# Altium PCB netv2mvp-usb3-v1.PcbDoc
Units mm, origin at the board's own origin, x right, y up, seen from the top; angles counter-clockwise.
Board outline 116 x 27 mm, 4 copper layers (Top Layer, Int1 (GND), Int2 (PWR), Bottom Layer), stack 1.115 mm thick; 6 components, 37 nets, 334 pads, 0 vias.
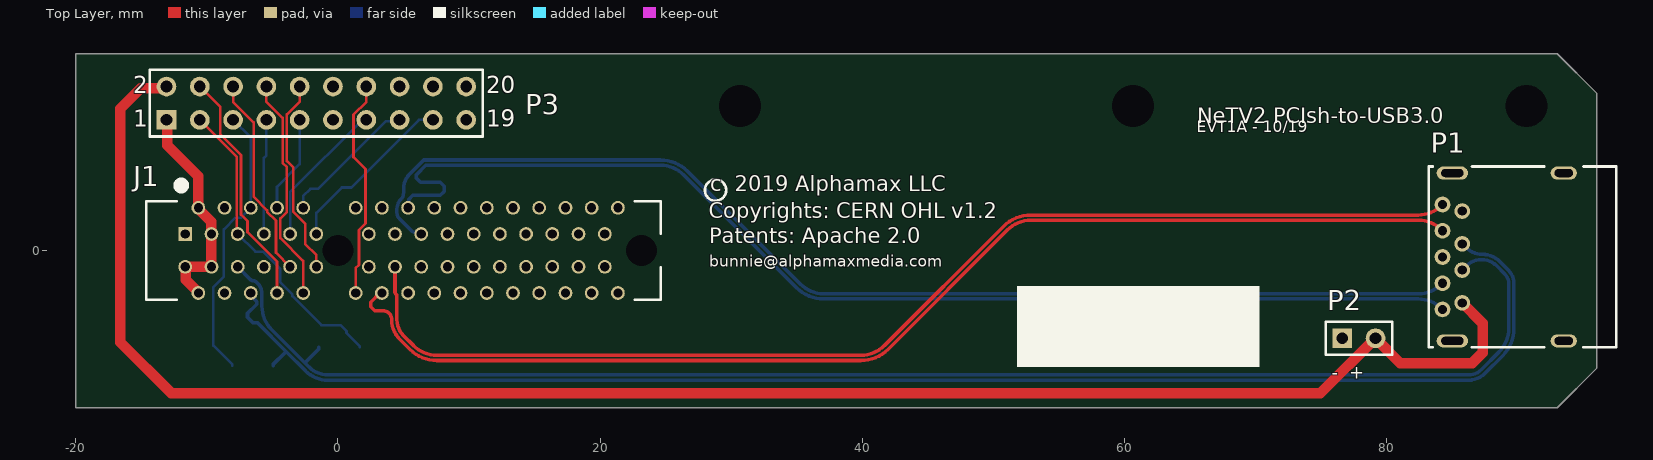
[diagram p0: Top Layer view]
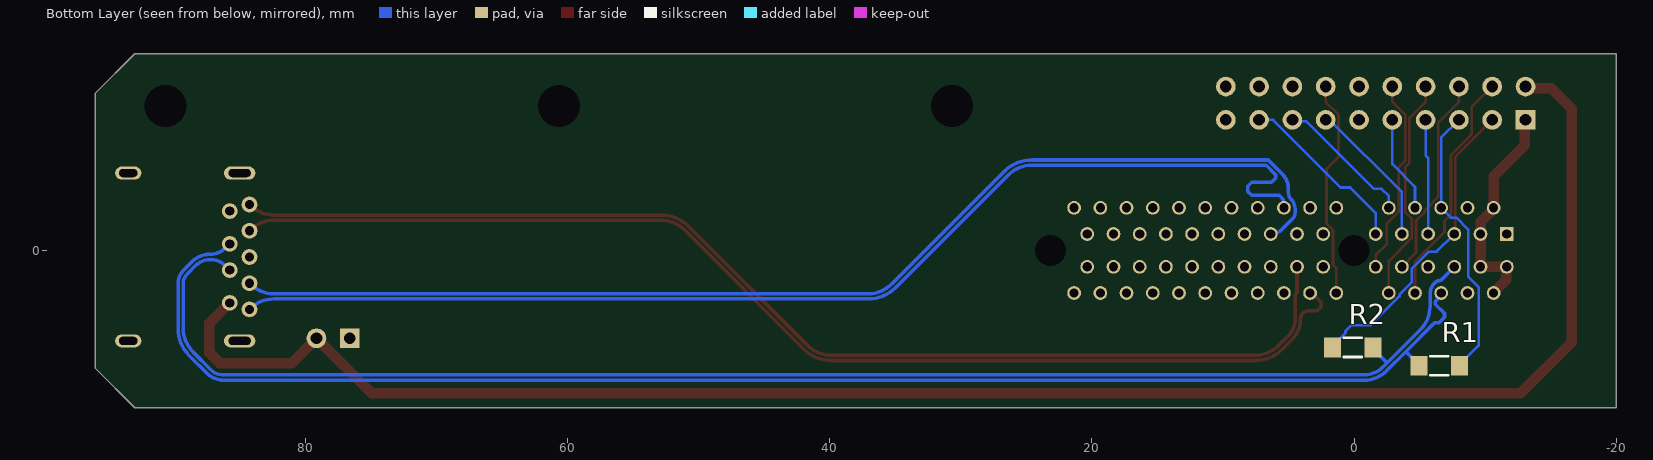
[diagram p1: Bottom Layer view, seen from below]
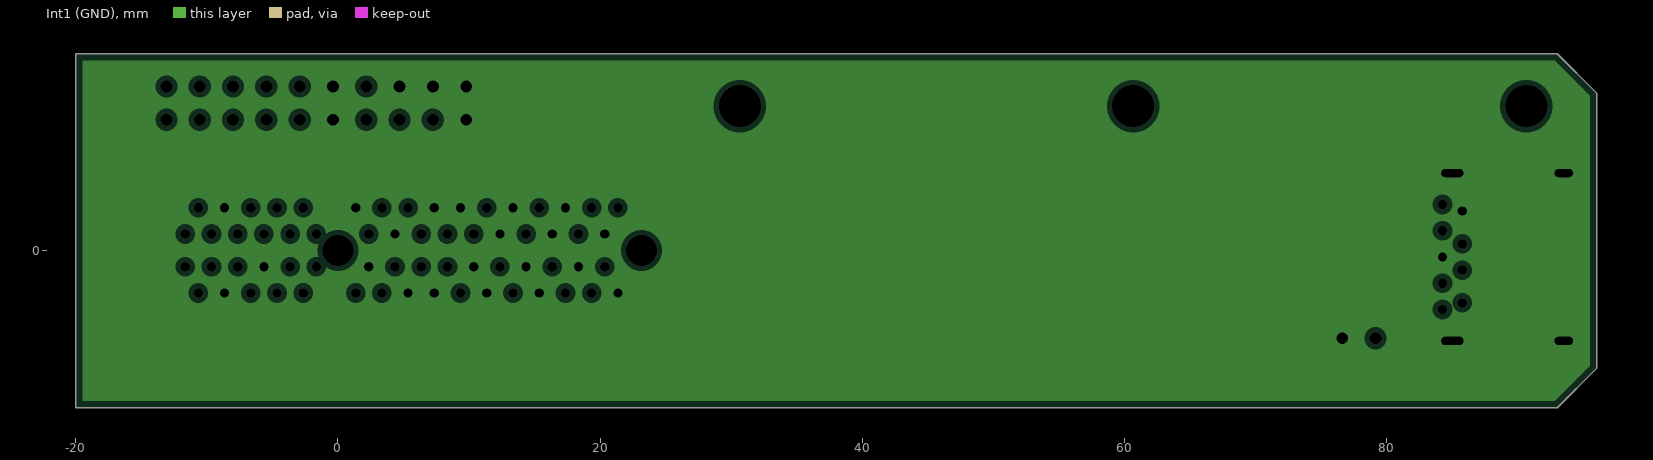
[diagram p2: Int1 (GND), clearances drawn from the general rule]
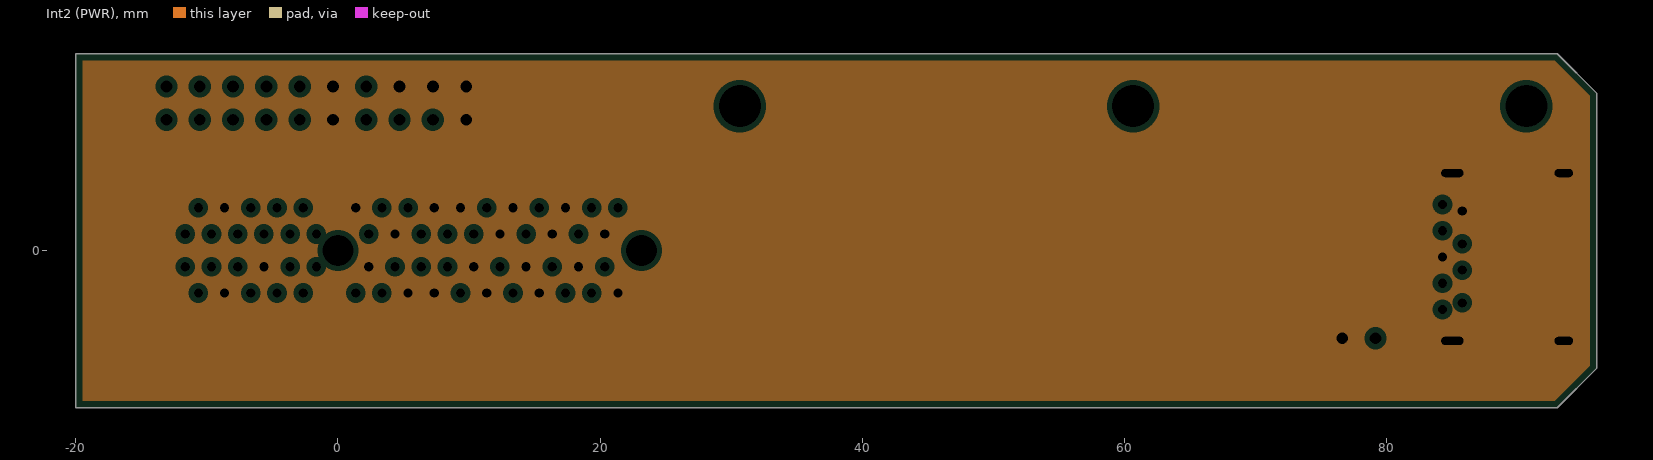
[diagram p3: Int2 (PWR), clearances drawn from the general rule]

## Layer stack, top to bottom
Top Solder: solder mask 0.0254, SM-001, Dk 4
Top Layer: signal copper 0.035
Dielectric 1: prepreg 0.1295, PP-017, Dk 4.3
Dielectric 2: prepreg 0.1295, PP-017, Dk 4.3
Int1 (GND): plane copper 0.035, net GND
Dielectric 3: core 0.4572, Core-035, Dk 4.7
Int2 (PWR): plane copper 0.035, net GND
Dielectric 4: prepreg 0.1295, PP-017, Dk 4.3
Dielectric 5: prepreg 0.1295, PP-017, Dk 4.3
Bottom Layer: signal copper 0.035
Bottom Solder: solder mask 0.0254, SM-001, Dk 4

## Board outline
-20,-12 -20,15 93,15 96,12 96,-9 93,-12

## Design rules (kind name [scope] priority, off if disabled: settings)
Clearance [All] p1: gap=0.125 ignorepadtopadclearanceinfootprint=FALSE
DiffPairsRouting [All] p1: maxlimit=0.127 minlimit=0.127 mostfreqgap=0.127 toplayer_minwidth=0.271 toplayer_maxwidth=0.271 toplayer_prefwidth=0.271 bottomlayer_minwidth=0.271 bottomlayer_maxwidth=0.271 bottomlayer_prefwidth=0.271 impedanceprofiledriven=TRUE impedanceprofileid={196FDF88-7312-467C-9229-585F1296B65F} impedanceprofilevalue=85.000000 maxuncoupledlength=12.7
HoleSize [All] p1: absolutevalues=TRUE maxlimit=5 minlimit=0.025 maxpercent=80.000 minpercent=20.000
MinimumSolderMaskSliver [All] p1 off: minsoldermaskwidth=0.254
PlaneClearance [All] p1: clearance=0.4
PlaneConnect [All] p1: planeconnectstyle=Relief reliefexpansion=0.4 reliefentries=4 reliefconductorwidth=0.3 reliefairgap=0.25
PolygonConnect [All] p1: connectstyle=Relief reliefconductorwidth=0.254 reliefentries=4 polygonreliefangle="90 Angle" airgapwidth=0.254
RoomDefinition connectors [InComponentClass('connectors')] p1: confinementstyle=ConfineIn formatcopy=TRUE lockcomponents=FALSE outline -16.224,-11.363 98.276,-11.363 98.276,14.137 -16.224,14.137
RoutingVias [All] p1: holewidth=0.711 width=1.27 viastyle="Through Hole" minholewidth=0.711 minwidth=1.27 maxholewidth=0.711 maxwidth=1.27
SilkToSilkClearance [All] p1 off: silktosilkclearance=0.254
SilkToSolderMaskClearance [IsPad] p1 off: minsilkscreentomaskgap=0.254 clearancetoexposedcopper=TRUE
SolderMaskExpansion [All] p1: expansion=0.102
Width [All] p1: maxlimit=5 minlimit=0.125 preferedwidth=0.2
23 further rules are at their usual default settings.

## Classes and differential pairs
differential pair SM: +SM_P -SM_N
differential pair PET0: +PET0_P -PET0_N
differential pair PER0: +PER0_P -PER0_N

## Components (designator, comment, footprint, x,y, rotation, side; value= is the part's Value field where it differs from the comment)
J1 "Molex 0877159102" BTB1-00-2V64 -11.65,1.25 r0 top
P1 "Molex 48393-0003" MOLEX_48393-0003 93.5,-0.5 r90 top
P2 "Header 2" HDR1X2 76.6,-6.7 r0 top
P3 "Header 10X2" HDR2X10 -13.08,9.96 r0 top
R1 "1.5k, 1%" B_RES1206 -6.5,-8.8 r0 bottom
R2 "1.5k, 1%" B_RES1206 0.1,-7.4 r180 bottom

## Footprints (in the part's own frame and the unit in brackets; to place one, negate y for a bottom-side part, rotate by r counter-clockwise, add the part's x,y. Pads: shape width x height; smd on the part's side, far side on the other; paste and mask are expansions set on the pad)
B_RES1206 [mm]
  rect 1.3x1.5 smd mask+0.07: 1(-1.55,0) 2(1.55,0)
  silkscreen extent -0.67,-0.72 0.67,0.72, body extent -1.6,-0.8 1.6,0.8, height 0.6
BTB1-00-2V64 [mm] "Board-to-Board Connector, PTH, Vertical, Pitch 1.00mm, 64-Position"
  rect 1.05x1.05 hole 0.7: A1(0,0)
  round 1.05 hole 0.7: A2(1,2) A3(2,0) A4(3,2) A5(4,0) A6(5,2) A7(6,0) A8(7,2) A9(8,0) A10(9,2) A11(10,0) A12(13,2) A13(14,0) A14(15,2) A15(16,0) A16(17,2) A17(18,0) A18(19,2) A19(20,0) A20(21,2) A21(22,0) A22(23,2) A23(24,0) A24(25,2) A25(26,0) A26(27,2) A27(28,0) A28(29,2) A29(30,0) A30(31,2) A31(32,0) A32(33,2) B1(0,-2.5) B2(1,-4.5) B3(2,-2.5) B4(3,-4.5) B5(4,-2.5) B6(5,-4.5) B7(6,-2.5) B8(7,-4.5) B9(8,-2.5) B10(9,-4.5) B11(10,-2.5) B12(13,-4.5) B13(14,-2.5) B14(15,-4.5) B15(16,-2.5) B16(17,-4.5) B17(18,-2.5) B18(19,-4.5) B19(20,-2.5) B20(21,-4.5) B21(22,-2.5) B22(23,-4.5) B23(24,-2.5) B24(25,-4.5) B25(26,-2.5) B26(27,-4.5) B27(28,-2.5) B28(29,-4.5) B29(30,-2.5) B30(31,-4.5) B31(32,-2.5) B32(33,-4.5)
  round 2.05 hole 2.35 unplated: MH1(11.65,-1.25) MH2(34.8,-1.25)
  silkscreen extent -2.98,-5 36.27,4, body extent -2.88,-6.35 36.15,2.5, height 11.25
HDR1X2 [mm] "Connector; Header; 2 Position"
  rect 1.5x1.5 hole 0.9: 1(0,0)
  round 1.5 hole 0.9: 2(2.54,0)
  silkscreen extent -1.27,-1.27 3.81,1.27
HDR2X10 [mm] "Connector; Header; 10x2 Position"
  rect 1.5x1.5 hole 0.9: 1(0,0)
  round 1.5 hole 0.9: 2(0,2.54) 3(2.54,0) 4(2.54,2.54) 5(5.08,0) 6(5.08,2.54) 7(7.62,0) 8(7.62,2.54) 9(10.16,0) 10(10.16,2.54) 11(12.7,0) 12(12.7,2.54) 13(15.24,0) 14(15.24,2.54) 15(17.78,0) 16(17.78,2.54) 17(20.32,0) 18(20.32,2.54) 19(22.86,0) 20(22.86,2.54)
  silkscreen extent -1.27,-1.27 24.13,3.81
MOLEX_48393-0003 [mm] "USB 3.0 Normal Type A R/A T/H"
  oval 1x2.4 hole 0.6 slot 1.7 at 90 deg mask+0.07: 0(-6.4,8.5) 0(6.4,8.5)
  oval 1x2 hole 0.6 slot 1.4 at 90 deg mask+0.07: 0(-6.4,0) 0(6.4,0)
  round 1.2 hole 0.7 mask+0.07: 1(-3.5,7.75) 2(-1,7.75) 3(1,7.75) 4(3.5,7.75) 5(4,9.25) 6(2,9.25) 7(0,9.25) 8(-2,9.25) 9(-4,9.25)
  silkscreen extent -6.9,-4 6.9,10.3, body extent -6.9,-4 6.9,10.25, height 7

## Part data
J1: library part CN-2P-F-J64, "Board-to-Board Connector, PTH, Vertical, Pitch 1.00mm, 64-Position", MPN=0877159102, MYPN=J-PCIE-X4, VENDOR=Molex
P1: library part USB_3_TYPE_A, "USB 3.0 Normal A Type R/A", MPN=48393-0003, MYPN=J-USB3-A-RA, VENDOR=Molex
P2: "Header, 2-Pin", LatestRevisionDate=17-Jul-2002, LatestRevisionNote="Re-released for DXP Platform.", Publisher="Altium Limited"
P3: "Header, 10-Pin, Dual row", LatestRevisionDate=17-Jul-2002, LatestRevisionNote="Re-released for DXP Platform.", Publisher="Altium Limited"
R1 R2: library part Res1, "Resistor", MPN=ANY, MYPN=R-152-1P-1_16W-1206, VENDOR=ANY

## Free pads (board coordinates)
  round 1.2 hole 3.2 unplated mask+0.07: 0(30.65,11) 0(60.65,11) 0(90.65,11)
  rect 2.54x0.051 on Top Overlay: 1(29.714,-6.101) 1(29.714,-6.051) 1(29.714,-6) 1(29.714,-5.949) 1(29.714,-5.898) 1(29.714,-5.847) 1(29.714,-5.797) 1(29.714,-5.746) 1(29.714,-5.695) 1(29.714,-5.644) 1(29.714,-5.593) 1(29.714,-5.543) 1(29.816,-5.339) 1(34.134,-5.339) 1(34.236,-6.101) 1(34.236,-5.695) 1(34.236,-6.152) 1(34.236,-6.051) 1(34.236,-6) 1(34.236,-5.949) 1(34.236,-5.746) 1(34.236,-5.644) 1(34.236,-5.593) 1(34.236,-5.543)
  rect 2.591x0.051 on Top Overlay: 1(29.74,-6.203) 1(29.74,-6.152) 1(29.74,-5.441) 1(29.74,-6.254) 1(29.74,-5.492) 1(29.791,-6.305) 1(34.159,-6.305) 1(34.21,-6.254) 1(34.21,-6.203) 1(34.21,-5.492) 1(34.21,-5.441) 1(34.21,-5.39)
  rect 2.642x0.051 on Top Overlay: 1(29.765,-5.39)
  rect 0.102x0.051 on Top Overlay: 1(29.816,-3.053) 1(30.883,-8.286) 1(33.067,-8.286) 1(34.134,-3.053)
  rect 0.152x0.051 on Top Overlay: 1(29.841,-8.591) 1(34.109,-8.591)
  rect 0.254x0.051 on Top Overlay: 1(29.841,-8.54) 1(29.841,-3.104) 1(30.857,-8.235) 1(33.093,-8.235) 1(34.109,-3.104) 1(34.109,-8.54)
  rect 0.356x0.051 on Top Overlay: 1(29.841,-3.155) 1(30.807,-8.184) 1(33.143,-8.184) 1(34.109,-3.155) 1(34.109,-8.489)
  rect 0.406x0.051 on Top Overlay: 1(29.867,-8.489)
  rect 0.508x0.051 on Top Overlay: 1(29.867,-8.438) 1(29.867,-3.206) 1(34.083,-8.438)
  rect 0.61x0.051 on Top Overlay: 1(29.867,-3.257) 1(34.083,-8.387) 1(34.083,-3.257)
  rect 0.66x0.051 on Top Overlay: 1(29.892,-8.387)
  rect 0.762x0.051 on Top Overlay: 1(29.892,-8.337) 1(29.892,-3.307) 1(34.058,-8.337)
  rect 0.864x0.051 on Top Overlay: 1(29.892,-8.286) 1(29.892,-3.358) 1(31.975,-2.291) 1(34.058,-8.286) 1(34.058,-3.358)
  rect 0.965x0.051 on Top Overlay: 1(29.892,-3.409) 1(31.975,-2.342) 1(31.975,-2.444) 1(31.975,-2.393) 1(34.058,-3.409)
  rect 1.118x0.051 on Top Overlay: 1(29.918,-8.184) 1(29.918,-3.46) 1(32,-2.799) 1(34.032,-8.184) 1(34.032,-3.46)
  rect 1.016x0.051 on Top Overlay: 1(29.918,-8.235) 1(32,-2.495) 1(34.032,-8.235)
  rect 2.337x0.051 on Top Overlay: 1(29.918,-6.355) 1(33.27,-4.831) 1(34.032,-6.355)
  rect 1.219x0.051 on Top Overlay: 1(29.918,-3.511) 1(32,-3.053) 1(34.032,-3.511)
  rect 2.286x0.051 on Top Overlay: 1(29.994,-5.289) 1(30.705,-4.831) 1(34.007,-5.289)
  rect 2.134x0.051 on Top Overlay: 1(30.07,-6.406) 1(30.578,-4.882) 1(33.372,-4.882) 1(33.88,-6.406)
  rect 1.93x0.051 on Top Overlay: 1(30.121,-7.981) 1(30.375,-6.609) 1(30.426,-6.66) 1(30.426,-4.984) 1(30.527,-6.965) 1(30.527,-6.914) 1(33.423,-6.965) 1(33.423,-6.914) 1(33.524,-6.66) 1(33.524,-4.984) 1(33.829,-7.981)
  rect 1.829x0.051 on Top Overlay: 1(30.121,-8.032) 1(30.222,-7.778) 1(30.273,-7.727) 1(30.273,-7.676) 1(30.273,-5.187) 1(30.324,-7.625) 1(30.324,-6.559) 1(30.324,-6.508) 1(30.324,-5.136) 1(30.375,-5.085) 1(30.527,-7.117) 1(30.527,-7.067) 1(33.423,-7.117) 1(33.423,-7.067) 1(33.626,-6.559) 1(33.626,-5.136) 1(33.677,-7.676) 1(33.677,-6.508) 1(33.677,-5.187) 1(33.728,-7.778) 1(33.829,-8.032)
  rect 2.032x0.051 on Top Overlay: 1(30.121,-5.238) 1(30.527,-6.863) 1(30.527,-6.813) 1(30.527,-6.762) 1(33.423,-6.863) 1(33.423,-6.813) 1(33.474,-6.762) 1(33.829,-5.238)
  rect 1.88x0.051 on Top Overlay: 1(30.146,-7.93) 1(30.197,-7.879) 1(30.197,-7.829) 1(30.248,-6.457) 1(30.4,-5.035) 1(30.553,-7.016) 1(33.448,-7.016) 1(33.55,-5.035) 1(33.601,-6.609) 1(33.601,-5.085) 1(33.702,-7.727) 1(33.702,-6.457) 1(33.753,-7.829) 1(33.804,-7.93) 1(33.804,-7.879)
  rect 1.778x0.051 on Top Overlay: 1(30.146,-8.083) 1(30.349,-7.575) 1(30.349,-7.524) 1(30.4,-7.473) 1(30.451,-7.371) 1(33.499,-7.371) 1(33.55,-7.473) 1(33.601,-7.575) 1(33.601,-7.524) 1(33.651,-7.625) 1(33.804,-8.083)
  rect 1.727x0.051 on Top Overlay: 1(30.172,-8.133) 1(30.426,-7.422) 1(30.476,-7.321) 1(30.527,-7.27) 1(30.527,-7.219) 1(30.527,-7.168) 1(32,-3.358) 1(33.423,-7.219) 1(33.423,-7.168) 1(33.474,-7.321) 1(33.524,-7.422)
  rect 1.981x0.051 on Top Overlay: 1(30.451,-6.711) 1(30.502,-4.933) 1(31.975,-3.409) 1(33.448,-4.933) 1(33.499,-6.711)
  rect 4.724x0.051 on Top Overlay: 1(31.975,-4.628) 1(31.975,-4.679) 1(31.975,-4.323)
  rect 4.623x0.051 on Top Overlay: 1(31.975,-4.577) 1(31.975,-4.527) 1(31.975,-4.476) 1(31.975,-4.425)
  rect 4.928x0.051 on Top Overlay: 1(31.975,-4.171)
  rect 5.334x0.051 on Top Overlay: 1(31.975,-3.866) 1(31.975,-3.917)
  rect 5.436x0.051 on Top Overlay: 1(31.975,-3.815) 1(31.975,-3.561)
  rect 2.184x0.051 on Top Overlay: 1(31.975,-3.46)
  rect 1.27x0.051 on Top Overlay: 1(31.975,-3.104) 1(31.975,-3.206) 1(31.975,-3.155) 1(31.975,-3.257)
  rect 1.067x0.051 on Top Overlay: 1(31.975,-2.749) 1(31.975,-2.698) 1(31.975,-2.647) 1(31.975,-2.596) 1(31.975,-2.545)
  rect 4.826x0.051 on Top Overlay: 1(31.975,-4.781) 1(31.975,-4.73) 1(31.975,-4.273)
  rect 5.029x0.051 on Top Overlay: 1(31.975,-4.12)
  rect 5.131x0.051 on Top Overlay: 1(31.975,-4.019)
  rect 5.232x0.051 on Top Overlay: 1(31.975,-3.968)
  rect 5.537x0.051 on Top Overlay: 1(31.975,-3.765) 1(31.975,-3.714) 1(31.975,-3.612)
  rect 5.639x0.051 on Top Overlay: 1(31.975,-3.663)
  rect 2.489x0.051 on Top Overlay: 1(31.975,-3.511) 1(34.261,-5.797) 1(34.261,-5.898) 1(34.261,-5.847)
  rect 1.473x0.051 on Top Overlay: 1(31.975,-3.307)
  rect 1.168x0.051 on Top Overlay: 1(31.975,-3.003) 1(31.975,-2.952) 1(31.975,-2.901) 1(31.975,-2.85)
  rect 4.877x0.051 on Top Overlay: 1(32,-4.222)
  rect 5.08x0.051 on Top Overlay: 1(32,-4.069)
  rect 4.674x0.051 on Top Overlay: 1(32,-4.374)
  rect 1.676x0.051 on Top Overlay: 1(33.448,-7.27) 1(33.804,-8.133)
  rect 0.711x0.051 on Top Overlay: 1(34.083,-3.307)
  rect 0.457x0.051 on Top Overlay: 1(34.109,-3.206)

## Nets (pads, with @x,y where several pads share a name; then routed paths per layer and width w, separated by ;. In a path a pad name is that pad's centre, name@x,y a point inside that pad or via, vN(x,y) a via of type N, cw(c..) or ccw(c..) an arc to the next point about the centre after c; other vN are vias at no path point)
GND: J1.A4 J1.A12 J1.A15 J1.A18 J1.A20 J1.A23 J1.A24 J1.A27 J1.A28 J1.A31 J1.B4 J1.B7 J1.B13 J1.B16 J1.B18 J1.B21 J1.B22 J1.B25 J1.B26 J1.B29 J1.B32 P1.0 P1.4 P1.7 P2.1 P3.11 P3.12 P3.16 P3.18 P3.19 P3.20
HAX_0: J1.A9 P3.13 | length 11.3
  Bottom Layer w0.2: J1.A9 -3.65,4.45 1.86,9.96 P3.13
HAX_1: J1.A7 P3.7 | length 8.8
  Bottom Layer w0.2: J1.A7 -5.65,7.05 -5.46,7.24 P3.7
HAX_2: J1.A10 P3.15 | length 10.7
  Bottom Layer w0.2: J1.A10 -2.65,4.15 -2.1,4.7 -1.506,4.7 3.65,9.856 4.596,9.856 P3.15
HAX_3: J1.B9 P3.6 | length 15.6
  Top Layer w0.2: P3.6 -8,11.339 -6.435,9.774 -6.435,4.096 -5.4,3.061 -5.4,2.939 -4.725,2.264 -4.725,-0.175 J1.B9
HAX_4: J1.A8 P3.9 | length 7.4
  Bottom Layer w0.2: J1.A8 -4.65,4.85 -2.92,6.58 P3.9
HAX_5: J1.B12 P3.14 | length 16.8
  Top Layer w0.2: J1.B12 1.35,-1.35 1.6,-1.1 1.6,1.561 2.1,2.061 2.1,6.195 1.185,7.11 1.185,10.365 2.16,11.34 P3.14
HAX_6: J1.B10 P3.8 | length 17.3
  Top Layer w0.2: P3.8 -5.46,11.339 -4.22,10.099 -4.22,6.679 -3.9,6.359 -3.9,2.939 -4.4,2.439 -4.4,0.939 -2.65,-0.811 J1.B10
HAX_7: J1.A6 P3.5 R1.1 | length 21.3
  Bottom Layer w0.2: R1.1 -8.05,-8.7 -9.5,-7.25 -9.5,-2.8 -8.7,-2 -8.7,1.6 -7.8,2.5 -7.4,2.5 J1.A6 -6.65,8.61 P3.5
HAX_8: J1.A5 P3.3 R2.1 | length 23.6
  Top Layer w0.2: P3.3 -7.725,7.145 -7.725,1.325 J1.A5
  Bottom Layer w0.2: J1.A5 -6.3,-0.1 -5.7,-0.1 -4.4,-1.4 -4.4,-2.439 -3.48,-3.359 -3.48,-3.48 -1.261,-5.7 0.2,-5.7 0.65,-6.15 0.65,-6.3 1.65,-7.3 R2.1
HAX_9: J1.B8 P3.4 | length 18.2
  Top Layer w0.2: P3.4 -8.975,10.935 -8.975,8.855 -7.4,7.28 -7.4,2.73 -6.9,2.23 -6.9,1.4 -4.65,-0.85 J1.B8
P5V_OPT: P1.1 P2.2 P3.2 | length 134.8
  Top Layer w0.8: P3.2 -13.21,12.37 -15.03,12.37 -16.6,10.8 -16.6,-7 -12.7,-10.9 74.94,-10.9 P2.2 81.04,-8.6 86.5,-8.6 87.3,-7.8 87.3,-5.55 P1.1
P12V: J1.A2 J1.A3 J1.B1 J1.B2 J1.B3 P3.1 | length 17
  Top Layer w0.8: P3.1 -13.01,9.89 -13.01,8.01 -10.65,5.65 J1.A2 -10.65,3.182 -9.65,2.182 J1.A3 J1.B3 J1.B1 -11.602,-1.298 -11.602,-2.23 -10.65,-3.182 J1.B2
PER0_N: J1.A17 P1.8 | length 89.6
  Bottom Layer w0.271: J1.A17@6.009,1.391 ccw(c6.35,1.733) J1.A17 cw(c6.35,2.457) 5.497,1.603 4.7,2.4 cw(c5.183,2.883) 4.5,2.883 4.5,3.176 cw(c5.524,3.176) 4.8,3.9 ccw(c4.312,4.388) 5.002,4.388 5.002,4.702 cw(c6.603,4.702) 5.471,5.834 6.535,6.898 9.1,6.898 24.586,6.898 cw(c24.586,3.963) 26.661,6.039 35.257,-2.557 ccw(c37.053,-0.761) 37.053,-3.301 82.397,-3.301 ccw(c82.397,-0.761) 84.193,-2.557 P1.8
PER0_P: J1.A16 P1.9 | length 89.4
  Bottom Layer w0.271: J1.A16 5.4,3.3 5.4,3.885 5.715,4.2 7.8,4.2 8.1,4.5 8.1,4.9 7.8,5.2 6.3,5.2 5.984,5.516 5.984,5.785 6.7,6.5 9.1,6.5 24.585,6.5 cw(c24.585,3.96) 26.381,5.756 34.976,-2.839 ccw(c37.052,-0.764) 37.052,-3.699 82.397,-3.699 cw(c82.397,-6.239) 84.193,-4.443 P1.9
PER1_N: J1.A22
PER1_P: J1.A21
PER2_N: J1.A26
PER2_P: J1.A25
PER3_N: J1.A30
PER3_P: J1.A29
PERST#: J1.A11 P3.17 | length 13.4
  Bottom Layer w0.2: J1.A11 -1.65,2.85 0.3,4.8 1.014,4.8 6.174,9.96 P3.17
PET0_N: J1.B15 P1.5 | length 89.6
  Top Layer w0.271: J1.B15 4.35,-3.179 ccw(c4.521,-3.179) 4.4,-3.3 cw(c4.159,-3.541) 4.5,-3.541 4.5,-5.293 ccw(c6.207,-5.293) 5,-6.5 5.756,-7.256 ccw(c7.552,-5.46) 7.552,-8 39.885,-8 ccw(c39.885,-5.46) 41.681,-7.256 50.777,1.84 cw(c52.851,-0.235) 52.851,2.699 82.397,2.699 ccw(c82.397,5.239) 84.193,3.443 P1.5
PET0_P: J1.B14 P1.6 | length 89.8
  Top Layer w0.271: J1.B14 3.209,-3.25 2.5,-3.959 2.5,-4.3 2.8,-4.6 3.417,-4.6 cw(c3.417,-5.283) 3.9,-4.8 cw(c3.412,-5.288) 4.102,-5.288 4.102,-5.294 ccw(c6.204,-5.294) 4.718,-6.781 5.475,-7.538 ccw(c7.551,-5.463) 7.551,-8.398 39.887,-8.398 ccw(c39.887,-5.464) 41.961,-7.539 51.057,1.557 cw(c52.853,-0.239) 52.853,2.301 82.397,2.301 cw(c82.397,-0.239) 84.193,1.557 P1.6
PET1_N: J1.B20
PET1_P: J1.B19
PET2_N: J1.B24
PET2_P: J1.B23
PET3_N: J1.B28
PET3_P: J1.B27
PRSNT_X1: J1.B17
PRSNT_X4: J1.B31
REFCLK_N: J1.A14
REFCLK_P: J1.A13
SM_N: J1.B5 P1.2 R2.2 | length 113.2
  Bottom Layer w0.271: J1.B5 -6.671,-2.229 ccw(c-6.5,-2.059) -6.5,-2.3 cw(c-6.5,-2.686) -6.227,-2.413 -6.024,-2.616 cw(c-7.166,-3.366) -5.8,-3.366 -5.8,-4.248 ccw(c-3.26,-4.248) -5.056,-6.044 -2.5,-8.6 ; R2.2 -1.45,-7.5 -2.5,-8.55 -2.5,-8.6 ; P1.2 86.074,-1.176 cw(c87.225,-2.326) 87.225,-0.699 cw(c87.225,-2.326) 88.376,-1.176 89,-1.8 cw(c88.276,-2.524) 89.3,-2.524 89.3,-5.948 cw(c86.76,-5.948) 88.556,-7.744 87.2,-9.1 cw(c86.234,-8.134) 86.234,-9.5 -0.6,-9.5 -0.751,-9.5 cw(c-0.751,-7.451) -2.2,-8.9 -2.5,-8.6
SM_P: J1.B6 P1.3 R1.2 | length 113.6
  Bottom Layer w0.271: J1.B6@-6.409,-3.491 J1.B6 -6.65,-3.45 -6.2,-3.9 -6.2,-4.1 -6.9,-4.8 -6.9,-5.1 -6.5,-5.5 -6.163,-5.5 -3.909,-7.754 ; R1.2 -4.95,-8.7 -4.004,-7.754 -3.909,-7.754 ; P1.3 86.016,0.234 ccw(c87.307,1.525) 87.307,-0.301 cw(c87.307,-2.127) 88.599,-0.836 89.282,-1.519 cw(c88.279,-2.523) 89.698,-2.523 89.698,-5.95 cw(c86.764,-5.95) 88.839,-8.024 87.479,-9.384 cw(c86.238,-8.142) 86.238,-9.898 -0.6,-9.898 -0.753,-9.898 cw(c-0.753,-7.455) -2.48,-9.183 -3.909,-7.754
WAKE#: J1.B11 P3.10 | length 15.1
  Top Layer w0.2: P3.10 -2.92,11.34 -3.895,10.365 -3.895,6.814 -3.4,6.319 -3.4,2.939 -2.5,2.039 -2.5,0.5 -1.65,-0.35 J1.B11
pads on no net: J1.A1 J1.A19 J1.A32 J1.B30 J1.MH1 J1.MH2

## Polygon pours and split planes (outlines as drawn)
GND on Int1 (GND) (split plane): 95.49,11.789 95.49,-8.789 92.789,-11.49 -19.49,-11.49 -19.49,14.49 92.789,14.49
GND on Int2 (PWR) (split plane): 95.49,11.789 95.49,-8.789 92.789,-11.49 -19.49,-11.49 -19.49,14.49 92.789,14.49

## Silkscreen, mask and mechanical layers (free items; w line width, h text height)
Top Overlay:
  circle w0.2: c28.8,4.6 r0.811
  rectangle: 51.8,-8.9 70.3,-2.7
  text "NeTV2 PCIsh-to-USB3.0" at 65.525,9.3 h2
  text "EVT1A - 10/19" at 65.5,8.7 h1.5
  text "c  2019 Alphamax LLC" at 28.388,4.141 h2
  text "Copyrights: CERN OHL v1.2" at 28.288,2.091 h2
  text "Patents: Apache 2.0" at 28.325,0.15 h2
  text "bunnie@alphamaxmedia.com" at 28.325,-1.55 h1.5
  text "-  +" at 75.8,-9.8 h1
Dimensions:
  lines w0.2: 97.65,-42.418 97.65,32.512 ; -20,-12 93,-12 96,-9 96,12 93,15 -20,15 -20,-12
  text "inside bezel face" at 97,-34.5 h1 r90
Fab Notes:
  drawing of 352 lines, arcs and shapes, not listed
  text "Layer" at -15.332,67.826 h1.52
  text "Name" at -4.92,67.826 h1.52
  text "Material" at 18.696,67.826 h1.52
  text "Thickness" at 33.932,67.826 h1.52
  text "Constant" at 50.438,67.826 h1.52
  text "Board Layer Stack" at 64.912,67.826 h1.52
  text "Top Overlay" at -4.92,64.778 h1.52
  text "Top Solder" at -4.92,61.73 h1.52
  text "SM-001" at 18.696,61.73 h1.52
  text "0.025mm" at 33.932,61.73 h1.52
  text "4" at 50.438,61.73 h1.52
  text "1" at -15.332,58.682 h1.52
  text "Top Layer" at -4.92,58.682 h1.52
  text "Copper" at 18.696,58.682 h1.52
  text "0.035mm" at 33.932,58.682 h1.52
  text "Dielectric 1" at -4.92,55.634 h1.52
  text "PP-017" at 18.696,55.634 h1.52
  text "0.130mm" at 33.932,55.634 h1.52
  text "4.3" at 50.438,55.634 h1.52
  text "Dielectric 2" at -4.92,52.586 h1.52
  text "PP-017" at 18.696,52.586 h1.52
  text "0.130mm" at 33.932,52.586 h1.52
  text "4.3" at 50.438,52.586 h1.52
  text "2" at -15.332,49.538 h1.52
  text "Int1 (GND)" at -4.92,49.538 h1.52
  text "Copper" at 18.696,49.538 h1.52
  text "0.035mm" at 33.932,49.538 h1.52
  text "Dielectric 3" at -4.92,46.49 h1.52
  text "Core-035" at 18.696,46.49 h1.52
  text "0.457mm" at 33.932,46.49 h1.52
  text "4.7" at 50.438,46.49 h1.52
  text "3" at -15.332,43.442 h1.52
  text "Int2 (PWR)" at -4.92,43.442 h1.52
  text "Copper" at 18.696,43.442 h1.52
  text "0.035mm" at 33.932,43.442 h1.52
  text "Dielectric 4" at -4.92,40.394 h1.52
  text "PP-017" at 18.696,40.394 h1.52
  text "0.130mm" at 33.932,40.394 h1.52
  text "4.3" at 50.438,40.394 h1.52
  text "Dielectric 5" at -4.92,37.346 h1.52
  text "PP-017" at 18.696,37.346 h1.52
  text "0.130mm" at 33.932,37.346 h1.52
  text "4.3" at 50.438,37.346 h1.52
  text "4" at -15.332,34.298 h1.52
  text "Bottom Layer" at -4.92,34.298 h1.52
  text "Copper" at 18.696,34.298 h1.52
  text "0.035mm" at 33.932,34.298 h1.52
  text "Bottom Solder" at -4.92,31.25 h1.52
  text "SM-001" at 18.696,31.25 h1.52
  text "0.025mm" at 33.932,31.25 h1.52
  text "4" at 50.438,31.25 h1.52
  text "Bottom Overlay" at -4.92,28.202 h1.52
  text "Total board thickness:" at -15.332,25.154 h1.52
  text "1.166mm" at 33.932,25.154 h1.52
  text "Soldermask: Green / Silk: White / Finsh: HASL" at -18,-25.5 h2
  text "All diff pairs control to 85 ohms +/- 10%" at 58.8,-33.8 h2

## Text inside footprints (layer, text, board x,y; h text height)
P3: Top Overlay "20" at 11.304,11.992 h1.27; Top Overlay "19" at 11.304,9.452 h1.27; Top Overlay "1" at -15.62,9.452 h1.27; Top Overlay "2" at -15.62,11.992 h1.27